# Altium PCB PCB_3_DETECTORES.PcbDoc
Units mm, origin at the board's own origin, x right, y up, seen from the top; angles counter-clockwise.
Board outline 222 x 55 mm, 2 copper layers (Top Layer, Bottom Layer); 66 components, 61 nets, 265 pads, 1 vias.
Unrouted connection lines stored in the file: 154.
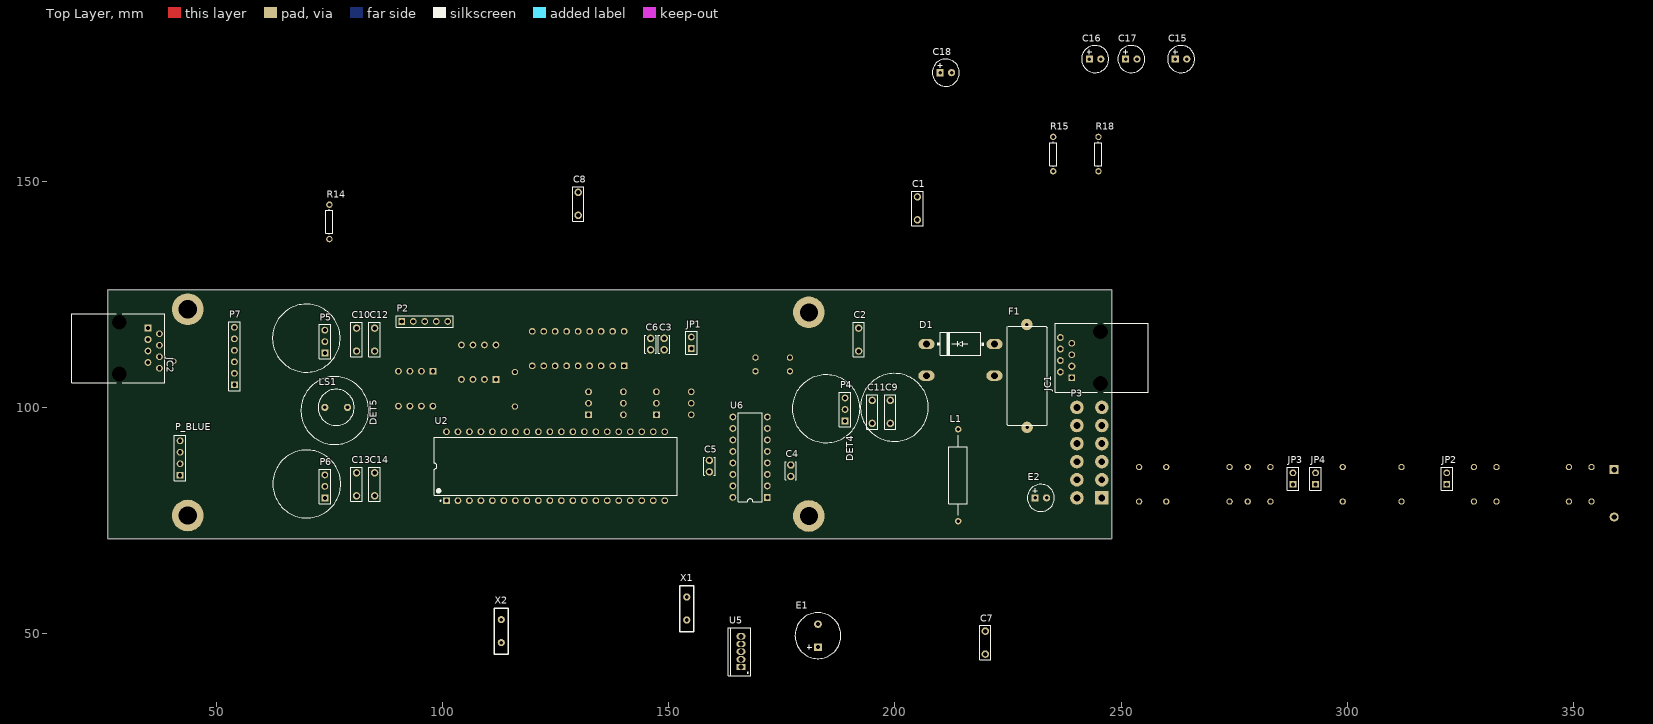
[diagram p0: Top Layer view]
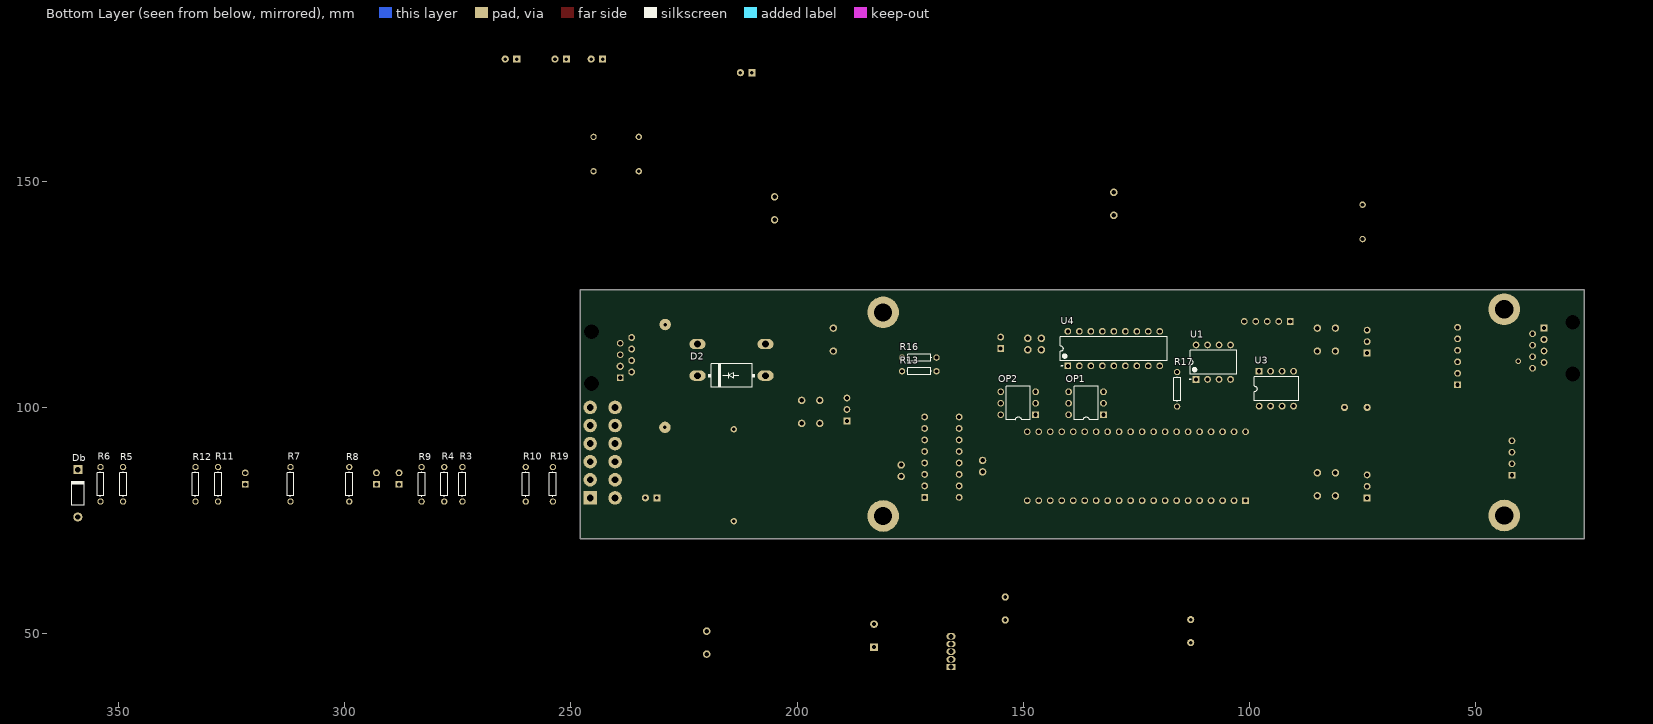
[diagram p1: Bottom Layer view, seen from below]

## Layer stack, top to bottom
Top Solder: solder mask 0.0102, Solder Resist, Dk 3.5
Top Layer: signal copper 0.0356
Dielectric 1: dielectric 0.32, FR-4, Dk 4.8
Bottom Layer: signal copper 0.0356
Bottom Solder: solder mask 0.0102, Solder Resist, Dk 3.5

## Board outline
26,71 248,71 248,126 26,126

## Design rules (kind name [scope] priority, off if disabled: settings)
Clearance [All] p1: gap=0.3
PolygonConnect [All] p1: connectstyle=Relief reliefconductorwidth=0.254 reliefentries=4 polygonreliefangle="90 Angle" airgapwidth=0.254
RoomDefinition U_MDL_RECEPTOR_IRF_2 [InComponentClass('U_MDL_RECEPTOR_IRF_2')] p1: confinementstyle=ConfineIn formatcopy=TRUE lockcomponents=FALSE outline 0,0 50.8,0 50.8,25.4 0,25.4
RoomDefinition U_MDL_RECEPTOR_IRF_1 [InComponentClass('U_MDL_RECEPTOR_IRF_1')] p2: confinementstyle=ConfineIn formatcopy=TRUE lockcomponents=FALSE outline 0,0 50.8,0 50.8,25.4 0,25.4
RoomDefinition U_MDL_RECEPTOR_IRF [InComponentClass('U_MDL_RECEPTOR_IRF')] p3: confinementstyle=ConfineIn formatcopy=TRUE lockcomponents=FALSE outline 0,0 50.8,0 50.8,25.4 0,25.4
RoomDefinition U_MDL_FUENTE_5V [InComponentClass('U_MDL_FUENTE_5V')] p4: confinementstyle=ConfineIn formatcopy=TRUE lockcomponents=FALSE outline 0,0 50.8,0 50.8,25.4 0,25.4
RoomDefinition U_MDL-485 [InComponentClass('U_MDL-485')] p5: confinementstyle=ConfineIn formatcopy=TRUE lockcomponents=FALSE outline 0,0 50.8,0 50.8,25.4 0,25.4
RoutingVias [All] p1: holewidth=0.711 width=1.27 viastyle="Through Hole" minholewidth=0.711 minwidth=1.27 maxholewidth=0.711 maxwidth=1.27
SolderMaskExpansion [All] p1: expansion=0.102
Width [All] p1: maxlimit=1 minlimit=0.7 preferedwidth=0.8
30 further rules are at their usual default settings.

## Classes and differential pairs
component class U_MDL_RS-232: C15 C16 C17 C18 P7 U6
component class U_MDL_RECEPTOR_IRF: C9 C11 P4 R13 R16
component class U_MDL_RECEPTOR_IRF_2: C13 C14 P6 R15 R18
component class U_MDL_RECEPTOR_IRF_1: C10 C12 P5 R14 R17
component class U_MDL_FUENTE_5V: C7 C8 D1 D2 E1 E2 F1 L1 P3 U5
component class U_MDL_CONTROL: C2 C3 C4 C5 C6 Db JC1 JC2 JP1 JP2 JP3 JP4 LS1 OP1 OP2 P2 P_BLUE R3 R4 R5 R6 R7 R8 R9 R10 R11 R12 R19 U2 U3 U4 X1 X2
component class U_MDL-485: C1 U1

## Components (designator, comment, footprint, x,y, rotation, side; value= is the part's Value field where it differs from the comment)
C1 "VP44BY224JB" VP44-2.5 205,144 r90 top
C2 "VP44BY224JB" VP44-2.5 192,115 r270 top
C3 "VP31BA220JB" VP31-2.5 149,114 r90 top
C4 "VP31BA220JB" VP31-2.5 177,86 r90 top
C5 "VP31BA220JB" VP31-2.5 159,87 r90 top
C6 "VP31BA220JB" VP31-2.5 146,114 r90 top
C7 "VP44BY224JB" VP44-2.5 220,48 r90 top
C8 "VP44BY224JB" VP44-2.5 130,145 r90 top
C9 "VP44BY224JB" VP44-2.5 199,99 r90 top
C10 "VP44BY224JB" VP44-2.5 81,115 r90 top
C11 "VP44BY224JB" VP44-2.5 195,99 r90 top
C12 "VP44BY224JB" VP44-2.5 85,115 r90 top
C13 "VP44BY224JB" VP44-2.5 81,83 r90 top
C14 "VP44BY224JB" VP44-2.5 85,83 r90 top
C15 "Cap2" C1UF 262,177 r0 top
C16 "Cap2" C1UF 243,177 r0 top
C17 "Cap2" C1UF 251,177 r0 top
C18 "Cap2" C1UF 210,174 r0 top
D1 "Diodo" 1N4000 207,114 r0 top
D2 "Diodo" 1N4000 222,107 r180 bottom
Db "Diode 1N4007" DO-41 359,81 r90 bottom
E1 "Cap Pol1" C1000UF 183,47 r90 top
E2 "Cap2" C1UF 231,80 r0 top
F1 "Fuse 1" FUSIBLE_BUSMATIC -1033.001,1362 r90 top
JC1 "RJ45" 15-43-6233 256,111 r90 top
JC2 "RJ45" 15-43-6233 18,113.1 r270 top
JP1 "Header 2" HDR1X2 155,113 r90 top
JP2 "Header 2" HDR1X2 322,83 r90 top
JP3 "Header 2" HDR1X2 288,83 r90 top
JP4 "Header 2" HDR1X2 293,83 r90 top
L1 "Inductor Adj" AXIAL-0.8 214,85 r90 top
LS1 "Speaker" C100UFA 74,100 r0 top
OP1 "4N33" 4n35_4n33_6pines 136,101 r90 bottom
OP2 "4N33" 4n35_4n33_6pines 151,101 r90 bottom
P2 "Header 5" HDR1X5 91,119 r0 top
P3 "Header 6X2" FP_CON12PAUTZ 243,90 r90 top
P4 "Header 3" HDR1X3 189,97 r90 top
P5 "Header 3" HDR1X3 74,112 r90 top
P6 "Header 3" HDR1X3 74,80 r90 top
P7 "Header 6" HDR1X6 54,105 r90 top
P_BLUE "Header 4" HDR1X4 42,85 r90 top
R3 "Res" AXIAL-0.3 274,83 r90 bottom
R4 "Res" AXIAL-0.3 278,83 r90 bottom
R5 "Res" AXIAL-0.3 349,83 r90 bottom
R6 "Res" AXIAL-0.3 354,83 r90 bottom
R7 "Res" AXIAL-0.3 312,83 r90 bottom
R8 "Res" AXIAL-0.3 299,83 r90 bottom
R9 "Res" AXIAL-0.3 283,83 r90 bottom
R10 "Res" AXIAL-0.3 260,83 r90 bottom
R11 "Res" AXIAL-0.3 328,83 r90 bottom
R12 "Res" AXIAL-0.3 333,83 r90 bottom
R13 "Res" AXIAL-0.3 173,108 r180 bottom
R14 "Res" AXIAL-0.3 75,141 r90 top
R15 "Res" AXIAL-0.3 235,156 r90 top
R16 "Res" AXIAL-0.3 173,111 r0 bottom
R17 "Res" AXIAL-0.3 116,104 r90 bottom
R18 "Res" AXIAL-0.3 245,156 r90 top
R19 "Res" AXIAL-0.3 254,83 r90 bottom
U1 "DS3695N" N08E 108,110 r90 bottom
U2 "PIC18F4620-I/P" PDIP600-P40 125,87 r90 top
U3 "25LC512-I/P" "memoria 24lc215_invertido" 94,104 r180 bottom
U4 "PIC16F628A-I/P" PDIP300-P18 130,113 r90 bottom
U5 "LM2575T-5.0" T05A 166,46 r90 top
U6 "MAX232N" N016 168,89 r90 top
X1 "20Mhz" XTAL-1 154,53 r90 top
X2 "20Mhz" XTAL-1 113,48 r90 top

## Footprints (in the part's own frame and the unit in brackets; to place one, negate y for a bottom-side part, rotate by r counter-clockwise, add the part's x,y. Pads: shape width x height; smd on the part's side, far side on the other; paste and mask are expansions set on the pad)
1N4000 [mil] "Diodo Rectificador de proposito general"
  oval 140x90 hole 60: 1(591.54,0) 2(0,0)
  silkscreen extent 90,-98 500,102, body extent -27,-102 615,106, height 183
4n35_4n33_6pines [mm] "optoacoplador"
  rect 1.5x1.5 hole 0.9: 1(-2.628,-3.717)
  round 1.5 hole 0.9: 2(-0.088,-3.717) 3(2.452,-3.717) 6(-2.628,3.988) 7(-0.088,3.988) 8(2.452,3.988)
  silkscreen extent -3.72,-2.55 3.7,2.75
15-43-6233 [mm] "Connector; PCB Jack, Thru-Hole; 1-Port; Unshielded without Lightpipes; Right Angle"
  rect 1.5x1.5 hole 0.9: 1(-4.445,16.89)
  round 1.5 hole 0.9: 2(-3.175,19.43) 4(-0.635,19.43) 5(0.635,16.89) 6(1.905,19.43) 7(3.175,16.89) 8(4.445,19.43)
  round 1.6 hole 0.9: 3(-1.905,16.89)
  round 2.95 hole 3.25 unplated: MH1(-5.715,10.54) MH2(5.715,10.54)
  silkscreen extent -7.62,0 7.62,20.58
AXIAL-0.3 [mm] "Axial Device, Thru-Hole; 2 Leads; 0.3 in Pin Spacing"
  round 1.4 hole 0.85: 1(-3.81,0) 2(3.81,0)
  silkscreen extent -2.77,-0.76 2.77,0.76
AXIAL-0.8 [mm] "Axial Device, Thru-Hole; 2 Leads; 0.8 in Pin Spacing"
  round 1.4 hole 0.85: 1(-10.16,0) 2(10.16,0)
  silkscreen extent -8.89,-2.03 8.89,2.03
C1UF [mm]
  rect 1.6x1.6 hole 0.8: 1(0,0)
  round 1.6 hole 0.8: 2(2.54,0)
  silkscreen extent -1.73,-3 4.27,3
C100UFA [mm]
  round 1.6 hole 0.8: 1(0,0) 2(5,0)
  silkscreen extent -1.5,-4 6.5,4
C1000UF [mm]
  rect 1.7x1.7 hole 0.9: 1(0,0)
  round 1.7 hole 0.9: 2(5.08,0)
  silkscreen extent -2.54,-5.08 7.62,5.08
DO-41 [mm] "Diode, Axial; Body 5.2 x 2.7 mm (LxDia. max), Lead Dia. 0.86 mm (max)"
  round 2 hole 1.2: 1(-5.23,0)
  rect 2x2 hole 1.2: 2(5.23,0)
  silkscreen extent -2.65,-1.4 2.75,1.4
FP_CON12PAUTZ [mm]
  rect 3x3 hole 1.5: 1(-10,-2.75)
  round 3 hole 1.5: 2(-10,2.75) 3(-6,-2.75) 4(-6,2.75) 5(-2,-2.75) 6(-2,2.75) 7(2,-2.75) 8(2,2.75) 9(6,-2.75) 10(6,2.75) 11(10,-2.75) 12(10,2.75)
FUSIBLE_BUSMATIC [mil]
  round 100 hole 30: 1(-49859,-49694) 2(-48964,-49692)
  silkscreen extent -49840,-49868 -48978,-49523
HDR1X2 [mm] "Connector; Header; 2 Position"
  rect 1.5x1.5 hole 0.9: 1(0,0)
  round 1.5 hole 0.9: 2(2.54,0)
  silkscreen extent -1.27,-1.27 3.81,1.27
HDR1X3 [mm] "Connector; Header; 3 Position"
  rect 1.5x1.5 hole 0.9: 1(0,0)
  round 1.5 hole 0.9: 2(2.54,0) 3(5.08,0)
  silkscreen extent -1.27,-1.27 6.35,1.27
HDR1X4 [mm] "Connector; Header; 4 Position"
  rect 1.5x1.5 hole 0.9: 1(0,0)
  round 1.5 hole 0.9: 2(2.54,0) 3(5.08,0) 4(7.62,0)
  silkscreen extent -1.27,-1.27 8.89,1.27
HDR1X5 [mm] "Connector; Header; 5 Position"
  rect 1.5x1.5 hole 0.9: 1(0,0)
  round 1.5 hole 0.9: 2(2.54,0) 3(5.08,0) 4(7.62,0) 5(10.16,0)
  silkscreen extent -1.27,-1.27 11.43,1.27
HDR1X6 [mm] "Connector; Header; 6 Position"
  rect 1.5x1.5 hole 0.9: 1(0,0)
  round 1.5 hole 0.9: 2(2.54,0) 3(5.08,0) 4(7.62,0) 5(10.16,0) 6(12.7,0)
  silkscreen extent -1.27,-1.27 13.97,1.27
"memoria 24lc215_invertido" [mm] "potenciometro pequeño"
  rect 1.5x1.5 hole 0.9: 1(-3.878,3.988)
  round 1.5 hole 0.9: 2(-1.338,3.988) 3(1.202,3.988) 4(3.742,3.988) 5(3.742,-3.717) 6(1.202,-3.717) 7(-1.338,-3.717) 8(-3.878,-3.717)
  silkscreen extent -4.97,-2.55 4.83,2.75
N08E [mm] "DIP, 8-Leads, Row Spacing 7.62mm, Pitch 2.54mm, Body 9.91x6.35mm"
  rect 1.5x1.5 hole 0.9: 1(-3.81,3.81)
  round 1.5 hole 0.9: 2(-3.81,1.27) 3(-3.81,-1.27) 4(-3.81,-3.81) 5(3.81,-3.81) 6(3.81,-1.27) 7(3.81,1.27) 8(3.81,3.81)
  silkscreen extent -3.93,-5.15 2.65,5.24, body extent -3.6,-5.15 3.6,5.15, height 5.34
N016 [mm] "DIP; 16 Leads; Row Spacing 7.62 mm; Pitch 2.54 mm"
  rect 1.5x1.5 hole 0.9: 1(-8.89,-3.81)
  round 1.5 hole 0.9: 2(-6.35,-3.81) 3(-3.81,-3.81) 4(-1.27,-3.81) 5(1.27,-3.81) 6(3.81,-3.81) 7(6.35,-3.81) 8(8.89,-3.81) 9(8.89,3.81) 10(6.35,3.81) 11(3.81,3.81) 12(1.27,3.81) 13(-1.27,3.81) 14(-3.81,3.81) 15(-6.35,3.81) 16(-8.89,3.81)
  silkscreen extent -9.85,-2.65 9.85,2.65
PDIP300-P18 [mm] "DIP, 18-Leads, Row Spacing 7.62mm, Pitch 2.54mm, Body 22.9x6.6mm"
  rect 1.5x1.5 hole 0.9: 1(-3.81,10.16)
  round 1.5 hole 0.9: 2(-3.81,7.62) 3(-3.81,5.08) 4(-3.81,2.54) 5(-3.81,0) 6(-3.81,-2.54) 7(-3.81,-5.08) 8(-3.81,-7.62) 9(-3.81,-10.16) 10(3.81,-10.16) 11(3.81,-7.62) 12(3.81,-5.08) 13(3.81,-2.54) 14(3.81,0) 15(3.81,2.54) 16(3.81,5.08) 17(3.81,7.62) 18(3.81,10.16)
  silkscreen extent -3.93,-11.85 2.65,11.85, body extent -3.6,-11.8 3.6,11.8, height 5.34
PDIP600-P40 [mm] "DIP, 40-Leads, Row Spacing 15.24mm, Pitch 2.54mm, Body 51.8x13.5mm"
  rect 1.5x1.5 hole 0.9: 1(-7.62,24.13)
  round 1.5 hole 0.9: 2(-7.62,21.59) 3(-7.62,19.05) 4(-7.62,16.51) 5(-7.62,13.97) 6(-7.62,11.43) 7(-7.62,8.89) 8(-7.62,6.35) 9(-7.62,3.81) 10(-7.62,1.27) 11(-7.62,-1.27) 12(-7.62,-3.81) 13(-7.62,-6.35) 14(-7.62,-8.89) 15(-7.62,-11.43) 16(-7.62,-13.97) 17(-7.62,-16.51) 18(-7.62,-19.05) 19(-7.62,-21.59) 20(-7.62,-24.13) 21(7.62,-24.13) 22(7.62,-21.59) 23(7.62,-19.05) 24(7.62,-16.51) 25(7.62,-13.97) 26(7.62,-11.43) 27(7.62,-8.89) 28(7.62,-6.35) 29(7.62,-3.81) 30(7.62,-1.27) 31(7.62,1.27) 32(7.62,3.81) 33(7.62,6.35) 34(7.62,8.89) 35(7.62,11.43) 36(7.62,13.97) 37(7.62,16.51) 38(7.62,19.05) 39(7.62,21.59) 40(7.62,24.13)
  silkscreen extent -7.74,-26.85 6.45,26.85, body extent -7.3,-26.85 7.3,26.85, height 6.35
T05A [mm] "TO, Thru-Hole, Vertical, Heatsink Mounted; 5 In-Line Leads; Pitch 1.70 mm"
  rect 1.4x2 hole 1.1: 1(-3.4,0)
  oval 1.4x2 hole 1.1: 2(-1.7,0) 3(0,0) 4(1.7,0) 5(3.4,0)
  silkscreen extent -5.3,-2.1 5.3,2.8, body extent -5.35,-2.15 5.35,2.85, height 19.6
VP31-2.5 [mm] "Capacitor, Ceramic, Thru-Hole, Dipped Radial; Body 4 x 2.5 mm (WxT) Pin Spacing 2.54 mm (typ)"
  round 1.65 hole 1: 1(-1.27,0) 2(1.27,0)
  silkscreen extent -2,-1.25 2,1.25
VP44-2.5 [mm] "Capacitor, Ceramic, Thru-Hole, Dipped Radial; Body 7.6 x 2.5 mm (WxT) Pin Spacing 5.08 mm (typ)"
  round 1.65 hole 1: 1(-2.54,0) 2(2.54,0)
  silkscreen extent -3.8,-1.25 3.8,1.25
XTAL-1 [mil]
  round 62 hole 31.5: 1(0,0) 2(200,0)
  silkscreen extent -100,-60 300,60

## Part data
C1 C2 C7 C8 C9 C10 C11 C12 C13 C14: "Dipped Radial Multilayer Ceramic Capacitor X7R: 220nF, 100V"
C3 C4 C5 C6: "Dipped Radial Multilayer Ceramic Capacitor COG (NPO): 22pF, 100V"
C15 C16 C17 C18 E2: "Capacitor"
D1 D2: "Diodo rectificador"
Db: "1 Amp General Purpose Rectifier"
E1: "Polarized Capacitor (Radial)"
F1: "Fuse"
JC1 JC2: library part 15-43-6233, "Right Angle, Standard Profile, RJ45-Keyed, Flange Mount PCB Jack"
JP1 JP2 JP3 JP4: "Header, 2-Pin"
L1: "Adjustable Inductor"
LS1: "Loudspeaker"
OP1 OP2: library part ILD74, "Optocoupler, Phototransistor Output, Dual Channel, TTL Compatible, Pb-free"
P2: "Header, 5-Pin"
P3: "Header, 6-Pin, Dual row"
P4 P5 P6: "Header, 3-Pin"
P7: "Header, 6-Pin"
P_BLUE: "Header, 4-Pin"
R3 R4 R5 R6 R7 R8 R9 R10 R11 R12 R13 R14 R15 R16 R17 R18 R19: library part Res1, "Resistor"
U1: "Multipoint RS485/RS422 Transceiver/Repeater"
U2: "Enhanced Flash Microcontroller with 10-Bit A/D and nanoWatt Technology, 64K Flash, 40-Pin PDIP, Industrial Temperature Range"
U3: "512 Kbit SPI Bus Serial EEPROM, 8-Pin PDIP, Industrial Temperature"
U4: "FLASH-Based 8-Bit CMOS Microcontroller with nanoWatt Technology, 2K (x14-Bit words) FLASH, 224 Bytes SRAM, 18-Pin PDIP, 3.0 to 5.5V Supply Range, Industrial Temperature"
U5: "SIMPLE SWITCHER 1A Step-Down Voltage Regulator"
U6: "Dual EIA-232 Driver/Receiver"
X1 X2: library part "Cristal de cuarzo", "Cristal de cuarzo"

## Free pads (board coordinates)
  round 7 hole 4: 0(43.7,76.1) 0(43.7,121.7) 0(181,76) 0(181,121)

## Via types
v1: diameter 1.27, hole 0.711, Top Layer to Bottom Layer, 1 vias

## Nets (pads, with @x,y where several pads share a name; then routed paths per layer and width w, separated by ;. In a path a pad name is that pad's centre, name@x,y a point inside that pad or via, vN(x,y) a via of type N, cw(c..) or ccw(c..) an arc to the next point about the centre after c; other vN are vias at no path point)
5VCC: C1.1 C2.1 C8.2 C9.2 C10.2 C13.2 C18.2 E2.2 JC1.1 JC2.1 L1.1 P3.6 P7.1 P_BLUE.1 R3.1 R4.1 R5.2 R6.2 R7.2 R9.2 R11.2 R12.2 R13.1 R14.1 R15.1 R16.2 R17.2 R18.2 U1.8 U2.1 U2.11 U2.32 U3.1 U3.2 U3.3 U3.8 U4.14 U5.4 U6.16
24VCC: C7.1 D2.2 E1.2 R8.1 R10.1 U5.1
485_DO_A: P3.1 P3.5 U1.6
485_DO_B: P3.3 P3.7 U1.7
485_RE: U1.2 U1.3 U2.4
BUZZER: Db.1 U2.38
DET_4: JC1.5
DET_5: JC1.6
DI_485: U1.4 U2.25
GND: C1.2 C2.2 C3.2 C4.1 C5.1 C6.2 C7.2 C8.1 C9.1 C10.1 C11.2 C12.2 C13.1 C14.2 C15.1 D1.1 E1.1 E2.1 JC1.7 JC1.8 JC2.8 JP1.2 JP2.2 JP3.1 JP4.1 LS1.2 OP1.8 OP2.8 P2.5 P3.2 P3.11 P4.2 P5.2 P6.2 P7.6 P_BLUE.2 R19.1 U1.5 U2.12 U2.31 U3.4 U3.7 U4.5 U5.3 U5.5 U6.15
NetC3_1: C3.1 U2.14 X1.1
NetC4_2: C4.2 U2.13 X1.2
NetC5_2: C5.2 U4.16 X2.2
NetC6_1: C6.1 U4.15 X2.1
NetC12_1: C12.1 P5.3 R14.2
NetC14_1: C14.1 P6.3 R15.2
NetC15_2: C15.2 U6.6
NetC16_1: C16.1 U6.1
NetC16_2: C16.2 U6.3
NetC17_1: C17.1 U6.4
NetC17_2: C17.2 U6.5
NetC18_1: C18.1 U6.2
NetD1_2: D1.2 L1.2 U5.2
NetD2_1: D2.1 F1.1
NetDb_2: Db.2 LS1.1
NetOP1_1: OP1.1 R8.2
NetOP2_1: OP2.1 R10.2
NetP2_1: P2.1 U4.6
NetP2_2: P2.2 U4.9
NetP2_3: P2.3 U4.10
NetP2_4: P2.4 U4.11
OUT_IR1: P4.1 R16.1 U2.15
OUT_IR2: P5.1 R17.1 U2.16
OUT_IR3: P6.1 R18.1 U2.17
P_RJ45: JC2.7 R19.2 U4.3
RGB_A: JC1.3
RGB_R: JC1.2
RGB_V: JC1.4
RO_485: U1.1 U2.26
RS-232_RX: P7.3
RS-232_RX1: P3.10 P7.5 U6.8
RS-232_TX: P7.2
RS-232_TX1: P3.8 P7.4 U6.7
RX_BLUE: P_BLUE.3
RX_TTL_V1: U2.9 U6.12
RX_TTL_V2: U2.3 U6.9
S_JP1: JP4.2 R4.2
S_JP2: JP2.1 R6.1
S_JP3: JP1.1 R5.1
S_JP4: JP3.2 R3.2
SCL_DS: R12.1 U3.6
SDA_DS: R11.1 U3.5
SN_OP1: OP1.2 P3.9
SN_OP2: OP2.2 P3.12
SP_OP1: OP1.7 R7.1
SP_OP2: OP2.7 R9.1
TX_BLUE: P_BLUE.4
TX_TTL_V1: U2.8 U6.11
TX_TTL_V2: U2.2 U6.10
VCC_IN: F1.2 P3.4
VS: C11.1 P4.3 R13.2
pads on no net: JC1.MH1 JC1.MH2 JC2.2 JC2.3 JC2.4 JC2.5 JC2.6 JC2.MH1 JC2.MH2 OP1.3 OP1.6 OP2.3 OP2.6 U2.5 U2.6 U2.7 U2.10 U2.18 U2.19 U2.20 U2.21 U2.22 U2.23 U2.24 U2.27 U2.28 U2.29 U2.30 U2.33 U2.34 U2.35 U2.36 U2.37 U2.39 U2.40 U4.1 U4.2 U4.4 U4.7 U4.8 U4.12 U4.13 U4.17 U4.18 U6.13 U6.14
copper on no net:
  other v1: 40.589,110.211

## Silkscreen, mask and mechanical layers (free items; w line width, h text height)
Top Overlay:
  circle w0.254: c76.2,99.3 r7.5
  circle w0.254: c70,83.08 r7.5
  circle w0.254: c184.8,99.7 r7.5
  circle w0.254: c199.9,100 r7.5
  circle w0.254: c69.9,115.3 r7.5
  text "DET5" at 85.5,96.1 h1.52 r90
  text "DET4" at 190.8,88.1 h1.52 r90
Top Paste:
  the board outline again, w0.254
Mechanical 1:
  lines w0.254: 26,127.746 26,128.254 ; 27.524,127.492 26,128 ; 27.524,128.508 26,128 ; 123.134,128 26,128 ; 134.866,128 232,128 ; 230.476,127.492 232,128 ; 230.476,128.508 232,128 ; 232,127.746 232,128.254 ; 256,72.048 256.508,70.524 ; 256,124 256.508,125.524 ; 256.254,70.524 256.762,70.524 ; 256.254,125.524 256.762,125.524 ; 256.508,92.92 256.508,70.524 ; 256.508,103.128 256.508,125.524 ; 257.016,72.048 256.508,70.524 ; 257.016,124 256.508,125.524
  text "206 (mm)" at 123.388,127.086 h1.52
  text "55 (mm)" at 257.422,93.174 h1.52 r90